# EAGLE board ponte_ampli_V1.4 (EAGLE 4.09)
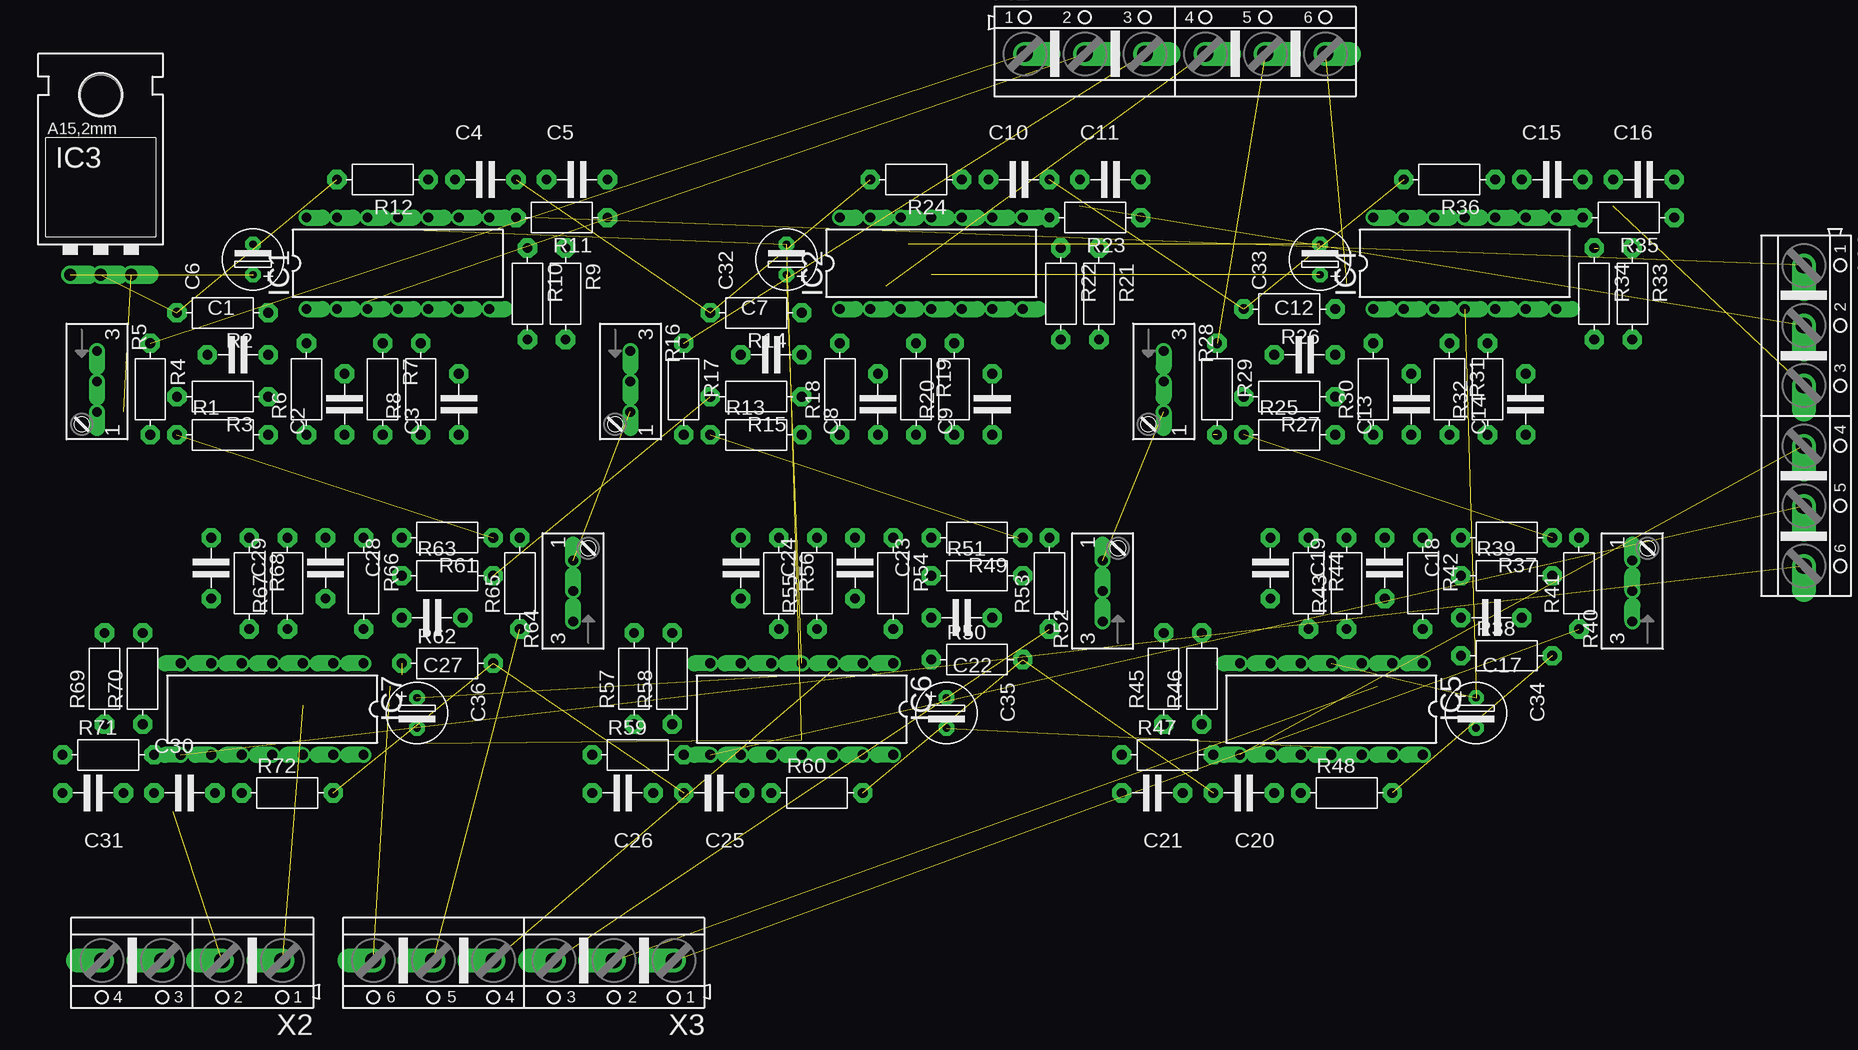
[diagram p0: board, top side]
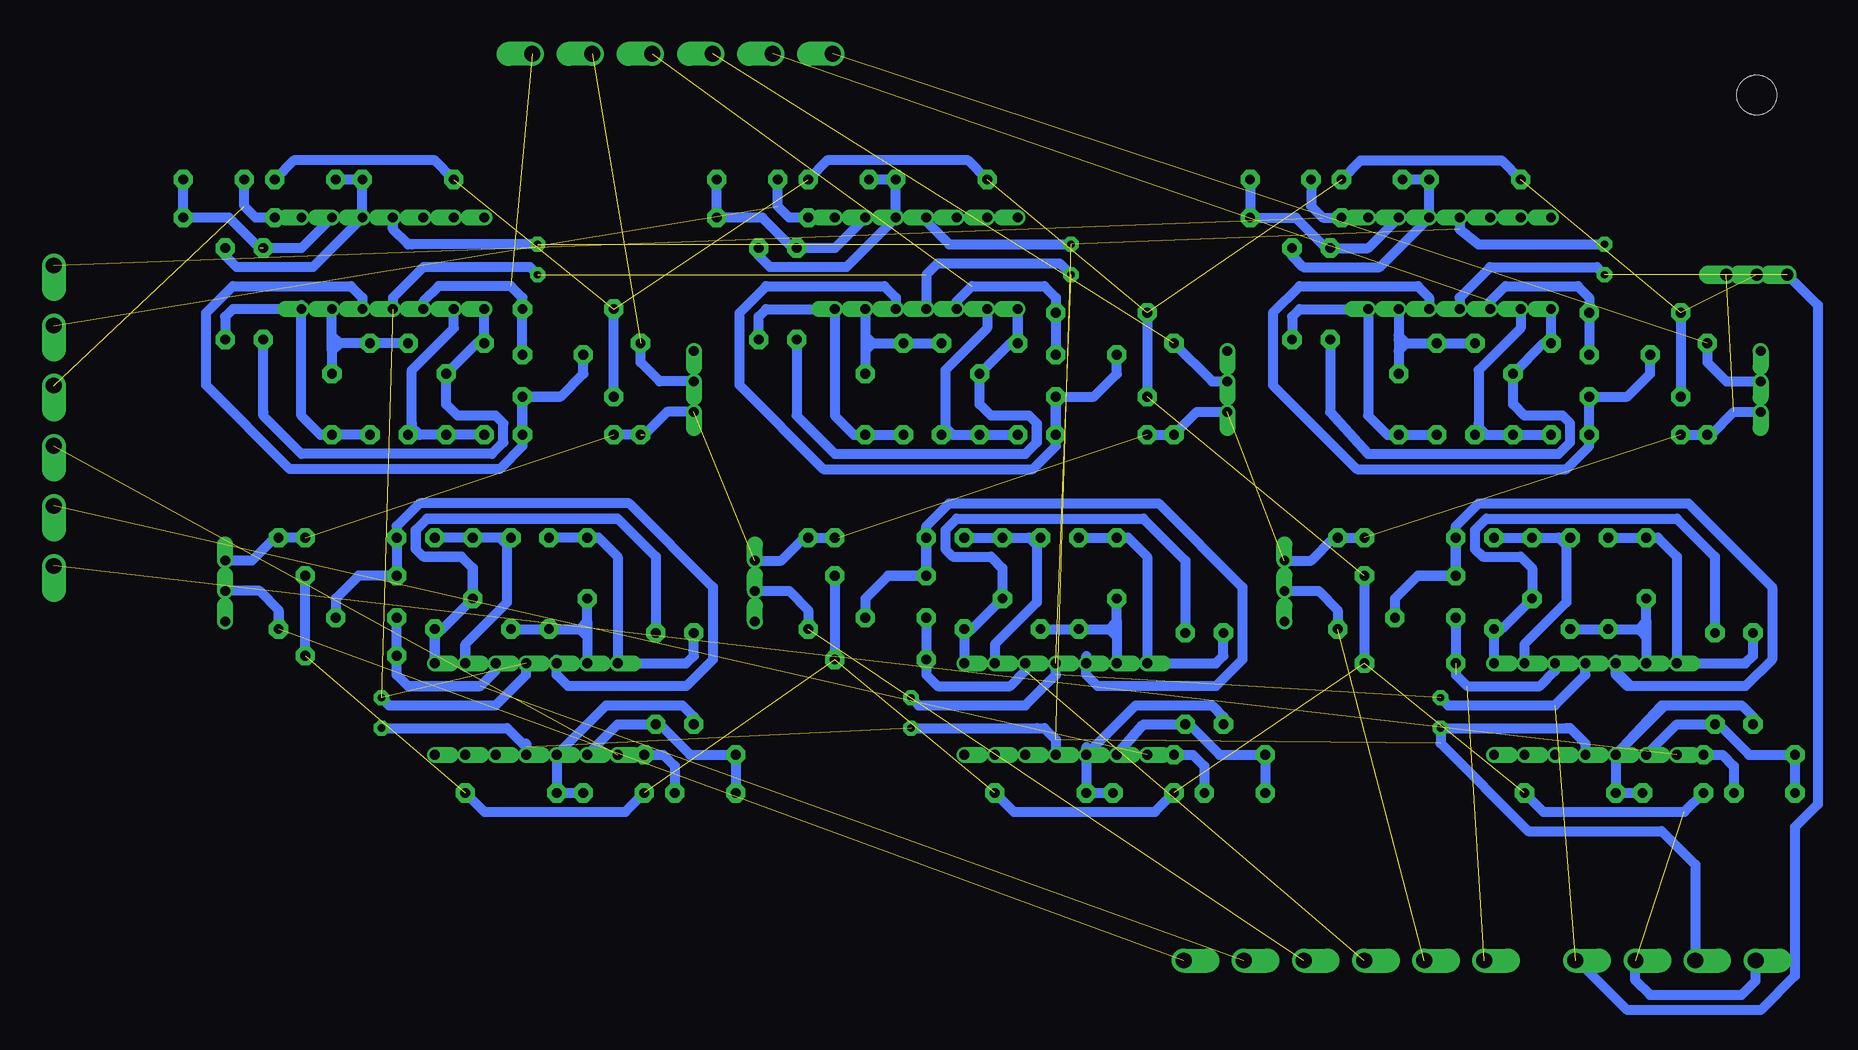
[diagram p1: board, bottom side, seen from below]

No outline drawn. Coordinates in mm, seen from the top.
Copper layers used: Bottom

## Footprints (pad centres in the part's own frame; a part is rotated, then mirrored left to right if it is on the bottom)
C-5 = drill 0.813 pad 1.6 octagon: 1 -2.54,0; 2 2.54,0
ES-2,5L = drill 0.61 pad 1.27 octagon: 1 0,0; 2 2.54,0
DIL14 = drill 0.813 offset: 1 -7.62,-3.81; 2 -5.08,-3.81; 3 -2.54,-3.81; 4 0,-3.81; 5 2.54,-3.81; 6 5.08,-3.81; 7 7.62,-3.81; 8 7.62,3.81; 9 5.08,3.81; 10 2.54,3.81; 11 0,3.81; 12 -2.54,3.81; 13 -5.08,3.81; 14 -7.62,3.81
78XXL = drill 1.016 offset: GND 0,-3.81; IN -2.54,-3.81; OUT 2.54,-3.81 | hole 3.302: 0,11.176
R-7,5 = drill 0.813 pad 1.6 octagon: 1 -3.81,0; 2 3.81,0
S64W = drill 0.813 offset: A 2.54,1.27; E -2.54,1.27; S 0,1.27
AK500/6 = drill 1.321 offset: 1 -12.522,0; 2 -7.518,0; 3 -2.515,0; 4 2.515,0; 5 7.518,0; 6 12.522,0
AK500/4 = drill 1.321 offset: 1 -7.518,0; 2 -2.489,0; 3 2.489,0; 4 7.518,0

## Placement (x,y rotation side)
C1  [C-5]  -44.77,-26.99 0 top
C2  [C-5]  -35.88,-31.11 90 top
C3  [C-5]  -26.35,-31.11 90 top
C4  [C-5]  -24.13,-12.38 0 top
C5  [C-5]  -16.51,-12.38 0 top
C6  [ES-2,5L]  -43.5,-20.32 90 top
C7  [C-5]  -0.32,-26.99 0 top
C8  [C-5]  8.57,-31.11 90 top
C9  [C-5]  18.1,-31.11 90 top
C10  [C-5]  20.32,-12.38 0 top
C11  [C-5]  27.94,-12.38 0 top
C12  [C-5]  44.13,-26.99 0 top
C13  [C-5]  53.02,-31.11 90 top
C14  [C-5]  62.55,-31.11 90 top
C15  [C-5]  64.77,-12.38 0 top
C16  [C-5]  72.39,-12.38 0 top
C17  [C-5]  59.69,-48.9 180 top
C18  [C-5]  50.8,-44.77 270 top
C19  [C-5]  41.27,-44.77 270 top
C20  [C-5]  39.05,-63.5 180 top
C21  [C-5]  31.43,-63.5 180 top
C22  [C-5]  15.56,-48.9 180 top
C23  [C-5]  6.67,-44.77 270 top
C24  [C-5]  -2.86,-44.77 270 top
C25  [C-5]  -5.08,-63.5 180 top
C26  [C-5]  -12.7,-63.5 180 top
C27  [C-5]  -28.57,-48.9 180 top
C28  [C-5]  -37.47,-44.77 270 top
C29  [C-5]  -46.99,-44.77 270 top
C30  [C-5]  -49.21,-63.5 0 top
C31  [C-5]  -56.83,-63.5 180 top
C32  [ES-2,5L]  0.95,-20.32 90 top
C33  [ES-2,5L]  45.4,-20.32 90 top
C34  [ES-2,5L]  58.42,-55.56 270 top
C35  [ES-2,5L]  14.29,-55.56 270 top
C36  [ES-2,5L]  -29.84,-55.56 270 top
IC1  TL084P  [DIL14]  -31.43,-19.37 0 top
IC2  TL084P  [DIL14]  13.02,-19.37 0 top
IC3  7805  [78XXL]  -56.2,-16.51 0 top
IC4  TL084P  [DIL14]  57.47,-19.37 0 top
IC5  TL084P  [DIL14]  46.35,-56.52 180 top
IC6  TL084P  [DIL14]  2.22,-56.52 180 top
IC7  TL084P  [DIL14]  -41.91,-56.52 180 top
R1  [R-7,5]  -46.04,-33.66 0 top
R2  [R-7,5]  -46.04,-23.5 180 top
R3  [R-7,5]  -46.04,-30.48 180 top
R4  [R-7,5]  -52.07,-29.84 270 top
R5  [S64W]  -57.78,-29.21 270 top
R6  [R-7,5]  -39.05,-29.84 90 top
R7  [R-7,5]  -32.7,-29.84 270 top
R8  [R-7,5]  -29.53,-29.84 90 top
R9  [R-7,5]  -17.46,-21.91 270 top
R10  [R-7,5]  -20.64,-21.91 270 top
R11  [R-7,5]  -17.78,-15.56 180 top
R12  [R-7,5]  -32.7,-12.38 180 top
R13  [R-7,5]  -1.59,-33.66 0 top
R14  [R-7,5]  -1.59,-23.5 180 top
R15  [R-7,5]  -1.59,-30.48 180 top
R16  [S64W]  -13.34,-29.21 270 top
R17  [R-7,5]  -7.62,-29.84 270 top
R18  [R-7,5]  5.4,-29.84 90 top
R19  [R-7,5]  11.75,-29.84 270 top
R20  [R-7,5]  14.92,-29.84 90 top
R21  [R-7,5]  26.99,-21.91 270 top
R22  [R-7,5]  23.81,-21.91 270 top
R23  [R-7,5]  26.67,-15.56 180 top
R24  [R-7,5]  11.75,-12.38 180 top
R25  [R-7,5]  42.86,-33.66 0 top
R26  [R-7,5]  42.86,-23.18 180 top
R27  [R-7,5]  42.86,-30.48 180 top
R28  [S64W]  31.11,-29.21 270 top
R29  [R-7,5]  36.83,-29.84 270 top
R30  [R-7,5]  49.85,-29.84 90 top
R31  [R-7,5]  56.2,-29.84 270 top
R32  [R-7,5]  59.37,-29.84 90 top
R33  [R-7,5]  71.44,-21.91 270 top
R34  [R-7,5]  68.26,-21.91 270 top
R35  [R-7,5]  71.12,-15.56 180 top
R36  [R-7,5]  56.2,-12.38 180 top
R37  [R-7,5]  60.96,-42.23 180 top
R38  [R-7,5]  60.96,-52.07 0 top
R39  [R-7,5]  60.96,-45.4 0 top
R40  [S64W]  72.71,-46.67 90 top
R41  [R-7,5]  66.99,-46.04 90 top
R42  [R-7,5]  53.98,-46.04 270 top
R43  [R-7,5]  47.62,-46.04 90 top
R44  [R-7,5]  44.45,-46.04 270 top
R45  [R-7,5]  32.38,-53.98 90 top
R46  [R-7,5]  35.56,-53.98 90 top
R47  [R-7,5]  32.7,-60.33 0 top
R48  [R-7,5]  47.62,-63.5 0 top
R49  [R-7,5]  16.83,-42.23 180 top
R50  [R-7,5]  16.83,-52.39 0 top
R51  [R-7,5]  16.83,-45.4 0 top
R52  [S64W]  28.57,-46.67 90 top
R53  [R-7,5]  22.86,-46.04 90 top
R54  [R-7,5]  9.84,-46.04 270 top
R55  [R-7,5]  3.49,-46.04 90 top
R56  [R-7,5]  0.32,-46.04 270 top
R57  [R-7,5]  -11.75,-53.98 90 top
R58  [R-7,5]  -8.57,-53.98 90 top
R59  [R-7,5]  -11.43,-60.33 0 top
R60  [R-7,5]  3.49,-63.5 0 top
R61  [R-7,5]  -27.3,-42.23 180 top
R62  [R-7,5]  -27.3,-52.7 0 top
R63  [R-7,5]  -27.3,-45.4 0 top
R64  [S64W]  -15.56,-46.67 90 top
R65  [R-7,5]  -21.27,-46.04 90 top
R66  [R-7,5]  -34.29,-46.04 270 top
R67  [R-7,5]  -40.64,-46.04 90 top
R68  [R-7,5]  -43.81,-46.04 270 top
R69  [R-7,5]  -55.88,-53.98 90 top
R70  [R-7,5]  -52.7,-53.98 90 top
R71  [R-7,5]  -55.56,-60.33 0 top
R72  [R-7,5]  -40.64,-63.5 0 top
X1  [AK500/6]  33.34,-1.91 0 top
X2  [AK500/4]  -48.58,-77.47 180 top
X3  [AK500/6]  -20.95,-77.47 180 top
X4  [AK500/6]  85.72,-32.07 270 top

## Library data of the parts
C1-C36 R1-R4 R6-R15 R17-R27 R29-R39 R41-R51 R53-R63 R65-R72 = discrete
IC1 IC2 IC4-IC7 = linear
IC3 = v-reg
R5 R16 R28 R40 R52 R64 = pot
X1-X4 = con-ptr500

## Nets
+5V: IC3.OUT R1.1 R4.2 R5.A R13.1 R16.A R17.2 R25.1 R28.A R29.2 R37.1 R40.A R41.2 R49.1 R52.A R53.2 R61.1 R64.A R65.2
+12V: C6.1 C32.1 C33.1 C34.1 C35.1 C36.1 IC1.4 IC2.4 IC3.IN IC4.4 IC5.4 IC6.4 IC7.4 X2.1
-12V: C6.2 C32.2 C33.2 C34.2 C35.2 C36.2 IC1.11 IC2.11 IC4.11 IC5.11 IC6.11 IC7.11 X2.3
N$1: C1.1 IC1.5 R1.2 R3.1
N$2: C1.2 IC1.3 R2.1 X1.2
N$3: C5.2 IC1.9 R10.1 R11.1
N$4: C2.2 IC1.1 R6.2 R10.2
N$5: R4.1 R5.S X1.1
N$6: C4.1 IC1.10 R9.1 R12.1
N$7: C2.1 IC1.2 R6.1 R7.2
N$8: C11.1 IC2.8 R23.2 X4.2
N$9: C3.1 IC1.7 R8.1 R9.2
N$10: C7.1 IC2.5 R13.2 R15.1
N$11: C7.2 IC2.3 R14.1 X1.4
N$12: R16.S R17.1 X1.3
N$13: C8.2 IC2.1 R18.2 R22.2
N$14: C8.1 IC2.2 R18.1 R19.2
N$15: C3.2 IC1.6 R7.1 R8.2
N$16: C9.1 IC2.7 R20.1 R21.2
N$17: C11.2 IC2.9 R22.1 R23.1
N$18: C10.1 IC2.10 R21.1 R24.1
N$19: C9.2 IC2.6 R19.1 R20.2
N$20: C12.1 IC4.5 R25.2 R27.1
N$21: C12.2 IC4.3 R26.1 X1.6
N$22: R28.S R29.1 X1.5
N$23: C13.2 IC4.1 R30.2 R34.2
N$24: C13.1 IC4.2 R30.1 R31.2
N$25: C14.1 IC4.7 R32.1 R33.2
N$26: C16.2 IC4.9 R34.1 R35.1
N$27: C15.1 IC4.10 R33.1 R36.1
N$28: C14.2 IC4.6 R31.1 R32.2
N$29: C17.1 IC5.5 R37.2 R39.1
N$30: C17.2 IC5.3 R38.1 X3.2
N$31: R40.S R41.1 X3.1
N$32: C18.2 IC5.1 R42.2 R46.2
N$33: C18.1 IC5.2 R42.1 R43.2
N$34: C19.1 IC5.7 R44.1 R45.2
N$35: C21.2 IC5.9 R46.1 R47.1
N$36: C20.1 IC5.10 R45.1 R48.1
N$37: C19.2 IC5.6 R43.1 R44.2
N$38: C22.1 IC6.5 R49.2 R51.1
N$39: C22.2 IC6.3 R50.1 X3.4
N$40: R52.S R53.1 X3.3
N$41: C23.2 IC6.1 R54.2 R58.2
N$42: C23.1 IC6.2 R54.1 R55.2
N$43: C24.1 IC6.7 R56.1 R57.2
N$44: C26.2 IC6.9 R58.1 R59.1
N$45: C25.1 IC6.10 R57.1 R60.1
N$46: C24.2 IC6.6 R55.1 R56.2
N$47: C27.1 IC7.5 R61.2 R63.1
N$48: C27.2 IC7.3 R62.1 X3.6
N$49: R64.S R65.1 X3.5
N$50: C28.2 IC7.1 R66.2 R70.2
N$51: C28.1 IC7.2 R66.1 R67.2
N$52: C29.1 IC7.7 R68.1 R69.2
N$53: C31.2 IC7.9 R70.1 R71.1
N$54: C30.2 IC7.10 R69.1 R72.1
N$55: C29.2 IC7.6 R67.1 R68.2
N$56: C16.1 IC4.8 R35.2 X4.3
N$57: C5.1 IC1.8 R11.2 X4.1
N$58: C31.1 IC7.8 R71.2 X4.6
N$59: C26.1 IC6.8 R59.2 X4.5
N$60: C21.1 IC5.8 R47.2 X4.4
PE: C4.2 C10.2 C15.2 C20.2 C25.2 C30.1 IC3.GND R2.2 R3.2 R12.2 R14.2 R15.2 R24.2 R26.2 R27.2 R36.2 R38.2 R39.2 R48.2 R50.2 R51.2 R60.2 R62.2 R63.2 R72.2 X2.2 X2.4

## Tracks (layer width: path | path; a pad name or v marks a point on that pad's centre or on a via)
+5V  (7 unrouted)
  Bottom 0.813: R1.1 R4.2 -52.39,-33.66 -54.29,-31.75 R5.A | R16.A -9.53,-31.75 R17.2 R13.1 | R28.A 34.61,-31.75 36.51,-33.66 | R29.2 R25.1 | R37.1 R41.2 67.31,-42.23 69.22,-44.13 R40.A | R52.A 25.08,-44.13 23.18,-42.23 R53.2 R49.1 20.32,-42.23 | R64.A -19.05,-44.13 -20.95,-42.23 R65.2 R61.1
+5V1
  Bottom 0.813: -12.06,-31.75 -9.53,-31.75 -7.62,-33.66 -5.4,-33.66
+5V2
  Bottom 0.813: 39.05,-33.66 36.51,-33.66 34.61,-31.75 32.38,-31.75
+5V3
  Bottom 0.813: 64.77,-42.23 67.31,-42.23 69.22,-44.13 71.44,-44.13
+5V4
  Bottom 0.813: 20.64,-42.23 23.18,-42.23 25.08,-44.13 27.3,-44.13
+5V5
  Bottom 0.813: -23.5,-42.23 -20.95,-42.23 -19.05,-44.13 -16.83,-44.13
+12V  (7 unrouted)
  Bottom 0.813: IC1.4 -31.43,-22.23 -33.97,-19.68 -42.86,-19.68 C6.1 | C32.1 1.91,-19.37 12.06,-19.37 13.02,-20.32 IC2.4 | C33.1 46.04,-19.68 54.93,-19.68 57.47,-22.23 IC4.4 | IC7.4 -41.91,-53.66 -39.37,-56.2 -30.48,-56.2 C36.1 | IC6.4 2.22,-53.66 4.76,-56.2 13.65,-56.2 C35.1 | X2.1 -41.27,-77.47 -45.4,-81.6 -56.52,-81.6 -59.37,-78.74 -59.37,-66.36 -61.28,-64.45 -61.28,-22.86 IC3.IN
+12V2
  Bottom 0.813: 57.47,-23.18 57.47,-22.23 54.93,-19.68 46.04,-19.68 45.4,-20.32
+12V3
  Bottom 0.813: 46.35,-52.7 46.35,-53.66 48.9,-56.2 57.78,-56.2 58.42,-55.56
+12V4
  Bottom 0.813: 2.22,-52.7 2.22,-53.66 4.76,-56.2 13.65,-56.2 14.29,-55.56
+12V5
  Bottom 0.813: -41.91,-52.7 -41.91,-53.66 -39.37,-56.2 -30.48,-56.2 -29.84,-55.56
-12V  (5 unrouted)
  Bottom 0.813: C6.2 -33.02,-17.78 -31.43,-16.51 IC1.11 | IC2.11 13.02,-15.88 11.11,-17.78 C32.2 | C33.2 56.2,-17.78 57.47,-16.51 IC4.11 | IC7.11 -41.91,-59.37 -40.64,-58.1 C36.2 -29.84,-59.37 -37.15,-66.67 -48.26,-66.67 -51.07,-69.48 X2.3 | C34.2 47.94,-58.1 46.35,-59.69 IC5.11 | C35.2 3.17,-58.1 2.22,-59.05 IC6.11
-12V2
  Bottom 0.813: 45.4,-17.78 55.88,-17.78
-12V3
  Bottom 0.813: 58.42,-58.1 47.94,-58.1
-12V4
  Bottom 0.813: 14.29,-58.1 3.81,-58.1
-12V5
  Bottom 0.813: -29.84,-58.1 -40.32,-58.1
N$1
  Bottom 0.813: IC1.5 -28.89,-22.23 -27.94,-21.27 -18.1,-21.27 -15.88,-23.5 -15.88,-29.53 -22.86,-36.51 -40.32,-36.51 -42.23,-34.61 R1.2 R3.1 -45.4,-30.48 -47.31,-28.57 C1.1
N$2  (1 unrouted)
  Bottom 0.813: C1.2 R2.1 -42.23,-22.23 -41.27,-21.27 -35.24,-21.27 -33.97,-22.54 IC1.3
N$3
  Bottom 0.813: C5.2 R11.1 -17.78,-15.56 -20.32,-18.1 R10.1 -23.81,-18.1 IC1.9
N$4
  Bottom 0.813: R6.2 -39.05,-26.35 | R6.2 IC1.1 | R6.2 -38.42,-26.04 C2.2 -35.88,-31.11 -36.83,-32.07 -40.01,-32.07 -40.64,-32.7 -40.64,-34.29 -39.69,-35.24 -23.81,-35.24 -20.64,-31.75 R10.2
N$5  (1 unrouted)
  Bottom 0.813: R4.1 -52.07,-27.62 -53.66,-29.21 R5.S
N$6
  Bottom 0.813: C4.1 R12.1 IC1.10 -24.77,-19.68 -18.41,-19.68 -17.46,-18.73 R9.1
N$7
  Bottom 0.813: R6.1 C2.1 -33.66,-33.66 | IC1.2 -36.51,-24.77 -33.02,-28.26 -33.02,-32.7 | -33.02,-32.7 -33.02,-33.34 R7.2 -33.66,-33.66 | -33.02,-32.7 -33.02,-33.02 -33.66,-33.66
N$8  (1 unrouted)
  Bottom 0.813: R23.2 IC2.8 R23.2 | C11.1 25.4,-14.61 24.45,-15.56 R23.2
N$9
  Bottom 0.813: R8.1 C3.1 -25.4,-33.66 -23.81,-32.07 IC1.7 -18.1,-23.18 -17.46,-23.81 R9.2
N$10
  Bottom 0.813: R15.1 R13.2 | R15.1 -0.95,-30.48 -2.86,-28.57 C7.1 | R15.1 2.22,-34.61 4.13,-36.51 21.59,-36.51 28.57,-29.53 28.57,-23.5 26.35,-21.27 16.51,-21.27 15.56,-22.23 IC2.5
N$11  (1 unrouted)
  Bottom 0.813: C7.2 R14.1 2.22,-22.23 3.17,-21.27 9.21,-21.27 10.48,-22.54 IC2.3
N$12  (1 unrouted)
  Bottom 0.813: R16.S -10.79,-29.21 R17.1
N$13
  Bottom 0.813: IC2.1 R18.2 6.03,-26.04 C8.2 8.57,-31.11 7.62,-32.07 4.45,-32.07 3.81,-32.7 3.81,-34.29 4.76,-35.24 20.64,-35.24 23.81,-32.07 R22.2
N$14
  Bottom 0.813: R18.1 C8.1 10.79,-33.66 | 10.79,-33.66 11.43,-33.02 11.43,-28.26 7.94,-24.77 IC2.2 | 10.79,-33.66 R19.2
N$15
  Bottom 0.813: R7.1 R8.2 -26.99,-26.04 | IC1.6 -26.35,-25.4 | -26.35,-26.67 C3.2 | -26.35,-26.67 -26.99,-26.04 | -26.35,-25.4 -26.35,-26.67 | -26.35,-25.4 -26.35,-25.72 -26.67,-26.04 -26.67,-25.72 -26.35,-25.4 | -26.35,-25.4 -26.99,-26.04
N$16
  Bottom 0.813: C9.1 R20.1 C9.1 | C9.1 19.05,-33.66 20.64,-32.07 IC2.7 26.35,-23.18 26.99,-23.81 R21.2
N$17
  Bottom 0.813: IC2.9 20.64,-18.1 R22.1 24.13,-18.1 26.67,-15.56 R23.1 C11.2
N$18
  Bottom 0.813: R21.1 26.99,-18.73 26.04,-19.68 19.68,-19.68 IC2.10 R24.1 | R24.1 C10.1 R24.1
N$19
  Bottom 0.813: R19.1 R20.2 17.46,-26.04 18.1,-25.4 | IC2.6 18.1,-25.4 | 18.1,-25.4 C9.2
N$20
  Bottom 0.813: C12.1 41.59,-28.57 43.5,-30.48 R27.1 | R25.2 R27.1 | R27.1 46.67,-34.61 48.58,-36.51 66.04,-36.51 73.03,-29.53 73.03,-23.5 70.8,-21.27 60.96,-21.27 60.01,-22.23 IC4.5
N$21  (1 unrouted)
  Bottom 0.813: R26.1 C12.2 R26.1 | R26.1 46.67,-22.23 47.62,-21.27 53.66,-21.27 54.93,-22.54 IC4.3
N$22  (1 unrouted)
  Bottom 0.813: R28.S 35.24,-29.21 36.83,-27.62 R29.1
N$23
  Bottom 0.813: IC4.1 R30.2 50.48,-26.04 C13.2 53.02,-31.11 52.07,-32.07 48.9,-32.07 48.26,-32.7 48.26,-34.29 49.21,-35.24 65.09,-35.24 68.26,-32.07 R34.2
N$24
  Bottom 0.813: R30.1 C13.1 55.24,-33.66 55.88,-33.02 | 55.88,-33.02 55.88,-28.26 52.39,-24.77 IC4.2 | 55.88,-33.02 55.88,-33.34 R31.2
N$25
  Bottom 0.813: IC4.7 65.09,-22.86 | IC4.7 65.09,-32.07 63.5,-33.66 C14.1 R32.1 | IC4.7 70.8,-23.18 71.44,-23.81 R33.2
N$26  (1 unrouted)
  Bottom 0.813: C16.2 R35.1 71.12,-15.56 68.58,-18.1 65.09,-18.1 IC4.9
N$27
  Bottom 0.813: C15.1 R36.1 IC4.10 64.14,-19.68 70.48,-19.68 71.44,-18.73 R33.1
N$28
  Bottom 0.813: 62.55,-26.67 IC4.6 | R31.1 R32.2 61.91,-26.04 62.55,-26.67 | 62.55,-26.67 C14.2
N$29
  Bottom 0.813: C17.1 62.23,-47.31 60.33,-45.4 R39.1 R37.2 57.15,-41.27 55.24,-39.37 37.78,-39.37 30.8,-46.35 30.8,-52.39 33.02,-54.61 42.86,-54.61 43.81,-53.66 IC5.5 43.81,-52.39
N$30  (1 unrouted)
  Bottom 0.813: C17.2 R38.1 57.15,-53.66 56.2,-54.61 50.16,-54.61 48.9,-53.34 IC5.3
N$31  (1 unrouted)
  Bottom 0.813: R40.S 68.58,-46.67 66.99,-48.26 R41.1
N$32
  Bottom 0.813: IC5.1 R42.2 53.34,-49.85 C18.2 50.8,-44.77 51.75,-43.81 54.93,-43.81 55.56,-43.18 55.56,-41.59 54.61,-40.64 38.73,-40.64 35.56,-43.81 R46.2
N$33
  Bottom 0.813: C18.1 R42.1 C18.1 | 47.94,-42.23 47.94,-47.62 51.44,-51.12 IC5.2 51.44,-53.02 | 47.94,-42.23 R43.2 | 47.94,-42.23 C18.1
N$34
  Bottom 0.813: R44.1 C19.1 40.32,-42.23 38.73,-43.81 IC5.7 33.02,-52.7 32.38,-52.07 R45.2
N$35
  Bottom 0.813: 35.88,-57.78 R46.1 | 35.88,-57.78 35.24,-57.78 32.7,-60.33 R47.1 C21.2 | 35.88,-57.78 38.73,-57.78 IC5.9
N$36
  Bottom 0.813: R45.1 32.38,-57.15 33.34,-56.2 39.69,-56.2 IC5.10 R48.1 C20.1
N$37
  Bottom 0.813: R44.2 41.59,-49.85 | R44.2 R43.1 R44.2 | 41.59,-49.85 41.59,-50.16 41.27,-50.48 IC5.6 | C19.2 41.27,-49.53 41.59,-49.85
N$38
  Bottom 0.813: C22.1 18.1,-47.31 16.19,-45.4 R51.1 R49.2 13.02,-41.27 11.11,-39.37 -6.35,-39.37 -13.34,-46.35 -13.34,-52.39 -11.11,-54.61 -1.27,-54.61 -0.32,-53.66 IC6.5 -0.32,-52.07
N$39  (1 unrouted)
  Bottom 0.813: IC6.3 4.76,-53.34 6.03,-54.61 12.06,-54.61 13.02,-53.66 R50.1 C22.2
N$40  (1 unrouted)
  Bottom 0.813: R52.S 24.45,-46.67 22.86,-48.26 R53.1
N$41
  Bottom 0.813: IC6.1 R54.2 9.21,-49.85 C23.2 6.67,-44.77 7.62,-43.81 10.79,-43.81 11.43,-43.18 11.43,-41.59 10.48,-40.64 -5.08,-40.64 -8.57,-44.13 R58.2
N$42
  Bottom 0.813: IC6.2 7.3,-51.12 3.81,-47.62 3.81,-42.23 | R54.1 C23.1 3.81,-42.23 | 3.81,-42.23 R55.2
N$43
  Bottom 0.813: R56.1 C24.1 -3.81,-42.23 -5.4,-43.81 IC6.7 -11.11,-52.7 -11.75,-52.07 R57.2
N$44
  Bottom 0.813: IC6.9 -5.08,-57.78 R58.1 -8.89,-57.78 -11.43,-60.33 R59.1 C26.2
N$45
  Bottom 0.813: R57.1 -11.75,-57.15 -10.79,-56.2 -4.45,-56.2 IC6.10 | IC6.10 -0.32,-59.69 | IC6.10 R60.1 C25.1
N$46
  Bottom 0.813: R55.1 R56.2 -2.54,-49.85 | -2.54,-49.85 -2.86,-50.16 IC6.6 | -2.54,-49.85 -2.86,-49.53 C24.2
N$47
  Bottom 0.813: R61.2 R63.1 | R63.1 -27.94,-45.4 -26.04,-47.31 C27.1 | R63.1 -31.11,-41.27 -33.02,-39.37 -50.48,-39.37 -57.47,-46.35 -57.47,-52.39 -55.24,-54.61 -45.72,-54.61 -44.45,-53.34 IC7.5 -44.45,-52.39
N$48  (2 unrouted)
  Bottom 0.813: C27.2 -31.11,-53.66 -32.07,-54.61 -38.1,-54.61 -39.37,-53.34 IC7.3
N$49  (1 unrouted)
  Bottom 0.813: R65.1 -21.27,-48.26 -19.68,-46.67 R64.S
N$50
  Bottom 0.813: IC7.1 R66.2 -34.92,-49.85 C28.2 -37.47,-44.77 -36.51,-43.81 -33.34,-43.81 -32.7,-43.18 -32.7,-41.59 -33.66,-40.64 -49.53,-40.64 -52.7,-43.81 R70.2
N$51
  Bottom 0.813: C28.1 R66.1 C28.1 | -39.69,-42.23 -40.32,-42.86 -40.32,-47.62 -36.83,-51.12 IC7.2 | C28.1 -39.69,-42.23 | -39.69,-42.23 R67.2
N$52
  Bottom 0.813: R68.1 C29.1 -47.94,-42.23 -49.53,-43.81 IC7.7 -55.24,-52.7 -55.88,-52.07 R69.2
N$53
  Bottom 0.813: IC7.9 -49.53,-57.78 R70.1 -53.02,-57.78 -55.56,-60.33 R71.1 C31.2
N$54
  Bottom 0.813: R69.1 -55.88,-57.15 -54.93,-56.2 -48.58,-56.2 IC7.10 R72.1 C30.2
N$55
  Bottom 0.813: R67.1 R68.2 -46.67,-49.85 | -46.67,-49.85 -46.67,-50.16 -46.99,-50.48 IC7.6 | C29.2 -46.99,-49.53 -46.67,-49.85
N$56  (1 unrouted)
  Bottom 0.813: IC4.8 R35.2 | C16.1 69.85,-14.61 68.9,-15.56 R35.2 | IC4.8 R35.2 | IC4.8 R35.2
N$57  (1 unrouted)
  Bottom 0.813: IC1.8 R11.2 -20,-15.56 -19.05,-14.61 C5.1
N$58  (1 unrouted)
  Bottom 0.813: IC7.8 R71.2 -53.34,-60.33 -54.29,-61.28 C31.1
N$59  (1 unrouted)
  Bottom 0.813: R59.2 IC6.8 R59.2 | C26.1 -10.16,-61.28 -9.21,-60.33 R59.2
N$60  (1 unrouted)
  Bottom 0.813: IC5.8 R47.2 34.92,-60.33 33.97,-61.28 C21.1
N$61
  Bottom 0.813: 15.56,-23.18 15.56,-22.23 16.51,-21.27 26.35,-21.27 28.57,-23.5 28.57,-29.53 21.59,-36.51 4.13,-36.51 2.22,-34.61 2.22,-30.48
N$62
  Bottom 0.813: 10.48,-23.18 10.48,-22.54 9.21,-21.27 3.17,-21.27 2.22,-22.23 2.22,-26.99
N$64
  Bottom 0.813: 3.81,-32.7 3.81,-34.29 4.76,-35.24
N$65
  Bottom 0.813: 10.79,-33.66 5.4,-33.66 | 10.79,-33.66 11.75,-33.66 11.43,-33.34 11.43,-32.7 | 10.79,-33.66 11.43,-33.02 11.43,-32.7 | 11.43,-28.26 11.43,-32.7
N$66
  Bottom 0.813: 14.92,-33.66 19.05,-33.66 20.64,-32.07 20.64,-23.18 26.35,-23.18 26.99,-23.81 26.99,-25.72
N$67
  Bottom 0.813: 7.94,-23.18 7.94,-24.77
N$68
  Bottom 0.813: 17.78,-12.38 15.56,-12.38 15.56,-15.56 19.68,-19.68 26.04,-19.68 26.99,-18.73 26.99,-18.1
N$69
  Bottom 0.813: 18.1,-23.18 18.1,-25.4 | 18.1,-28.57 18.1,-26.67 17.46,-26.04 18.1,-25.4 | 18.1,-25.4 18.1,-25.72 17.78,-26.04 17.78,-25.72 18.1,-25.4
N$70
  Bottom 0.813: 57.47,-15.56 57.47,-16.51
N$71
  Bottom 0.813: 60.01,-23.18 60.01,-22.23 60.96,-21.27 70.8,-21.27 73.03,-23.5 73.03,-29.53 66.04,-36.51 48.58,-36.51 46.67,-34.61 46.67,-30.48 43.5,-30.48 41.59,-28.57 41.59,-26.99
N$72
  Bottom 0.813: 54.93,-23.18 54.93,-22.54 53.66,-21.27 47.62,-21.27 46.67,-22.23 46.67,-26.99
N$73
  Bottom 0.813: 36.83,-26.04 36.83,-27.62 35.24,-29.21 32.38,-29.21
N$74
  Bottom 0.813: 49.85,-26.04 49.85,-26.35 | 49.85,-26.04 49.85,-23.18 | 49.85,-26.04 50.48,-26.04 53.02,-28.57 53.02,-31.11 52.07,-32.07 48.9,-32.07 48.26,-32.7 48.26,-34.29 49.21,-35.24 65.09,-35.24
N$75
  Bottom 0.813: 52.39,-23.18 52.39,-24.77 55.88,-28.26 55.88,-32.7 | 55.88,-32.7 55.88,-33.34 56.2,-33.66 55.24,-33.66 | 49.85,-33.66 55.24,-33.66 | 55.88,-32.7 55.88,-33.02 55.24,-33.66
N$76
  Bottom 0.813: 59.37,-33.66 63.5,-33.66 65.09,-32.07 65.09,-23.18 70.8,-23.18 71.44,-23.81 71.44,-25.72
N$77
  Bottom 0.813: 74.93,-12.38 74.93,-15.56 71.12,-15.56 68.58,-18.1 65.09,-18.1 62.55,-15.56
N$78
  Bottom 0.813: 62.23,-12.38 60.01,-12.38 60.01,-15.56 64.14,-19.68 70.48,-19.68 71.44,-18.73 71.44,-18.1
N$79
  Bottom 0.813: 62.55,-25.4 62.55,-23.18 | 62.55,-26.67 62.55,-28.57 | 56.2,-26.04 61.91,-26.04 | 61.91,-26.04 62.55,-26.67 | 62.55,-26.67 62.55,-25.4 | 62.55,-25.4 62.55,-25.72 62.23,-26.04 62.23,-25.72 62.55,-25.4 | 61.91,-26.04 62.55,-25.4
N$80
  Bottom 0.813: 69.85,-12.38 69.85,-14.61 68.9,-15.56 65.09,-15.56
N$81
  Bottom 0.813: 43.81,-52.7 43.81,-53.66 42.86,-54.61 33.02,-54.61 30.8,-52.39 30.8,-46.35 37.78,-39.37 55.24,-39.37 57.15,-41.27 57.15,-45.4 60.33,-45.4 62.23,-47.31 62.23,-48.9
N$82
  Bottom 0.813: 48.9,-52.7 48.9,-53.34 50.16,-54.61 56.2,-54.61 57.15,-53.66 57.15,-48.9
N$83
  Bottom 0.813: 66.99,-49.85 66.99,-48.26 68.58,-46.67 71.44,-46.67
N$84
  Bottom 0.813: 53.98,-49.85 53.98,-49.53 | 53.98,-49.85 53.98,-52.7 | 53.98,-49.85 53.34,-49.85 50.8,-47.31 50.8,-44.77 51.75,-43.81 54.93,-43.81 55.56,-43.18 55.56,-41.59 54.61,-40.64 38.73,-40.64
N$85
  Bottom 0.813: 51.44,-52.7 51.44,-51.12 47.94,-47.62 47.94,-43.18 | 47.94,-43.18 47.94,-42.55 47.62,-42.23 48.58,-42.23 | 48.58,-42.23 53.98,-42.23 | 47.94,-43.18 47.94,-42.86 48.58,-42.23
N$86
  Bottom 0.813: 44.45,-42.23 40.32,-42.23 38.73,-43.81 38.73,-52.7 33.02,-52.7 32.38,-52.07 32.38,-50.16
N$87
  Bottom 0.813: 28.89,-63.5 28.89,-60.33 32.7,-60.33 35.24,-57.78 38.73,-57.78 41.27,-60.33
N$88
  Bottom 0.813: 41.59,-63.5 43.81,-63.5 43.81,-60.33 39.69,-56.2 33.34,-56.2 32.38,-57.15 32.38,-57.78
N$89
  Bottom 0.813: 41.27,-50.48 41.27,-52.7 | 41.27,-49.21 41.27,-47.31 | 47.62,-49.85 41.91,-49.85 | 41.91,-49.85 41.27,-49.21 | 41.27,-49.21 41.27,-50.48 | 41.27,-50.48 41.27,-50.16 41.59,-49.85 41.59,-50.16 41.27,-50.48 | 41.91,-49.85 41.27,-50.48
N$90
  Bottom 0.813: 33.97,-63.5 33.97,-61.28 34.92,-60.33 38.73,-60.33
N$91
  Bottom 0.813: -0.32,-52.7 -0.32,-53.66 -1.27,-54.61 -11.11,-54.61 -13.34,-52.39 -13.34,-46.35 -6.35,-39.37 11.11,-39.37 13.02,-41.27 13.02,-45.4 16.19,-45.4 18.1,-47.31 18.1,-48.9
N$92
  Bottom 0.813: 4.76,-52.7 4.76,-53.34 6.03,-54.61 12.06,-54.61 13.02,-53.66 13.02,-48.9
N$93
  Bottom 0.813: 22.86,-49.85 22.86,-48.26 24.45,-46.67 27.3,-46.67
N$94
  Bottom 0.813: 9.84,-49.85 9.84,-49.53 | 9.84,-49.85 9.84,-52.7 | 9.84,-49.85 9.21,-49.85 6.67,-47.31 6.67,-44.77 7.62,-43.81 10.79,-43.81 11.43,-43.18 11.43,-41.59 10.48,-40.64
N$95
  Bottom 0.813: 7.3,-52.7 7.3,-51.12 3.81,-47.62 3.81,-43.18 | 3.81,-43.18 3.81,-42.55 3.49,-42.23 4.45,-42.23 | 9.84,-42.23 4.45,-42.23 | 3.81,-43.18 3.81,-42.86 4.45,-42.23
N$96
  Bottom 0.813: -5.4,-43.81 -5.4,-52.7 -11.11,-52.7 -11.75,-52.07 -11.75,-50.16
N$97
  Bottom 0.813: -15.24,-63.5 -15.24,-60.33 -11.43,-60.33 -8.89,-57.78 -5.4,-57.78
N$98
  Bottom 0.813: -2.54,-63.5 -0.32,-63.5 -0.32,-60.33 -4.45,-56.2 -10.79,-56.2 -11.75,-57.15 -11.75,-57.78
N$99
  Bottom 0.813: -2.86,-50.48 -2.86,-52.7 | -2.86,-49.21 -2.86,-47.31 | 3.49,-49.85 -2.22,-49.85 | -2.22,-49.85 -2.86,-49.21 | -2.86,-49.21 -2.86,-50.48 | -2.86,-50.48 -2.86,-50.16 -2.54,-49.85 -2.54,-50.16 -2.86,-50.48 | -2.22,-49.85 -2.86,-50.48
N$100
  Bottom 0.813: -10.16,-63.5 -10.16,-61.28 -9.21,-60.33 -5.4,-60.33
N$101
  Bottom 0.813: -44.45,-52.7 -44.45,-53.66 -45.4,-54.61 -55.24,-54.61 -57.47,-52.39 -57.47,-46.35 -50.48,-39.37 -33.02,-39.37 -31.11,-41.27 -31.11,-45.4 -27.94,-45.4 -26.04,-47.31 -26.04,-48.9
N$102
  Bottom 0.813: -39.37,-52.7 -39.37,-53.34 -38.1,-54.61 -32.07,-54.61 -31.11,-53.66 -31.11,-48.9
N$103
  Bottom 0.813: -21.27,-49.85 -21.27,-48.26 -19.68,-46.67 -16.83,-46.67
N$104
  Bottom 0.813: -34.29,-49.85 -34.29,-49.53 | -34.29,-49.85 -34.29,-52.7 | -49.53,-40.64 -33.66,-40.64 -32.7,-41.59 -32.7,-43.18 -33.34,-43.81 -36.51,-43.81 -37.47,-44.77 -37.47,-47.31 -34.92,-49.85 -34.29,-49.85
N$105
  Bottom 0.813: -36.83,-52.7 -36.83,-51.12 -40.32,-47.62 -40.32,-43.18 | -40.32,-43.18 -40.32,-42.55 -40.64,-42.23 -39.69,-42.23 | -34.29,-42.23 -39.69,-42.23 | -40.32,-43.18 -40.32,-42.86 -39.69,-42.23
N$106
  Bottom 0.813: -43.81,-42.23 -47.94,-42.23 -49.53,-43.81 -49.53,-52.7 -55.24,-52.7 -55.88,-52.07 -55.88,-50.16
N$107
  Bottom 0.813: -59.37,-63.5 -59.37,-60.33 -55.56,-60.33 -53.02,-57.78 -49.53,-57.78 -46.99,-60.33
N$108
  Bottom 0.813: -46.67,-63.5 -44.45,-63.5 -44.45,-60.33 -48.26,-56.2 -54.93,-56.2 -55.88,-57.15 -55.88,-57.78
N$109
  Bottom 0.813: -46.99,-50.48 -46.99,-52.7 | -46.99,-49.21 -46.99,-47.31 | -40.64,-49.85 -46.35,-49.85 | -46.35,-49.85 -46.99,-49.21 | -46.99,-49.21 -46.99,-50.48 | -46.99,-50.48 -46.99,-50.16 -46.67,-49.85 -46.67,-50.16 -46.99,-50.48 | -46.35,-49.85 -46.99,-50.48
N$110
  Bottom 0.813: -54.29,-63.5 -54.29,-61.28 -53.34,-60.33 -49.53,-60.33
N$111
  Bottom 0.813: 5.4,-26.04 5.4,-26.35 | 5.4,-23.18 5.4,-26.04 | 5.4,-26.04 6.03,-26.04
N$112
  Bottom 0.813: 7.62,-32.07 8.57,-31.11
N$113
  Bottom 0.813: 68.26,-31.75 68.26,-25.72
N$114
  Bottom 0.813: -41.91,-59.37 -41.91,-60.33
N$115
  Bottom 0.813: 2.22,-59.37 2.22,-60.33
N$116
  Bottom 0.813: 46.35,-59.37 46.35,-60.33
N$117
  Bottom 0.813: 35.56,-44.13 35.56,-50.16
N$118
  Bottom 0.813: 0.32,-42.23 -3.81,-42.23
N$119
  Bottom 0.813: -8.57,-44.13 -8.57,-50.16
N$120
  Bottom 0.813: -52.7,-44.13 -52.7,-50.16
PE  (13 unrouted)
  Bottom 0.813: C4.2 -23.18,-10.79 -34.92,-10.79 R12.2 | R24.2 9.53,-10.79 21.27,-10.79 C10.2 | R2.2 R3.2 | R14.2 R15.2 | R27.2 R26.2 | R36.2 53.98,-10.79 65.72,-10.79 C15.2 | R48.2 49.85,-65.09 38.1,-65.09 C20.2 | R51.2 R50.2 | C25.2 -6.03,-65.09 5.71,-65.09 R60.2 | R63.2 R62.2 | C30.1 -50.16,-65.09 -38.42,-65.09 R72.2 | X2.4 -56.1,-79.16 -54.93,-80.33 -47.31,-80.33 -46.04,-79.06 -46.04,-77.47 X2.2 | R38.2 R39.2 R38.2
PE1
  Bottom 0.813: 22.86,-12.38 21.27,-10.79 9.53,-10.79 7.94,-12.38
PE2
  Bottom 0.813: 67.31,-12.38 65.72,-10.79 53.98,-10.79 52.39,-12.38
PE3
  Bottom 0.813: 36.51,-63.5 38.1,-65.09 49.85,-65.09 51.44,-63.5
PE4
  Bottom 0.813: -7.62,-63.5 -6.03,-65.09 5.71,-65.09 7.3,-63.5
PE5
  Bottom 0.813: -51.75,-63.5 -50.16,-65.09 -38.42,-65.09 -36.83,-63.5